# EAGLE board Qwiic_Hall_Effect_Sensor_TMAG5273_Mini (EAGLE 9.6.2)
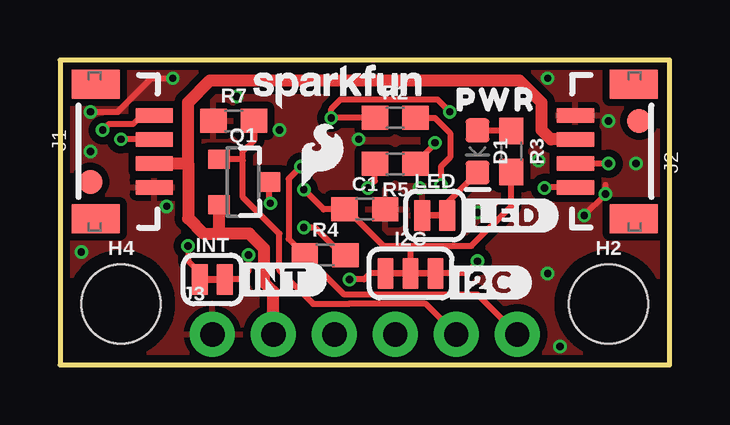
[diagram p0: board, top side]
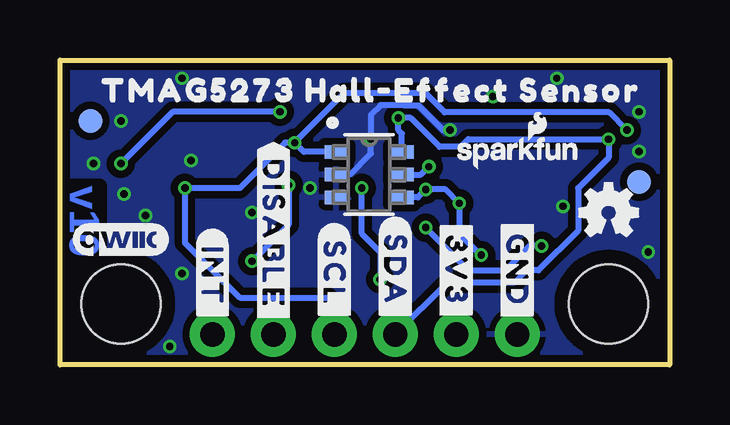
[diagram p1: board, bottom side, seen from below]

Size 25.4 x 12.7 mm. Coordinates in mm from the lower left corner, seen from the top.
Outline: 0,0 25.4,0 25.4,12.7 0,12.7 0,0
Copper layers (1*16): Top 0.035mm / dielectric 1.5mm / Bottom 0.035mm
Design rules "SparkFun-2-Layer-Minimum-JLCPCB": minimum track width 5mil, minimum drill 0.3mm, track to track 5mil, track to pad 5mil, pad to pad 5mil, via to via 5mil, smd to smd 5mil, copper to edge 7mil, drill to drill 7mil, minimum pad ring 5mil, minimum via ring 5mil, stop-mask expansion 2.5mil, vias tented up to drill 25mil, thermal gap 10mil

## Footprints (pad centres in the part's own frame; a part is rotated, then mirrored left to right if it is on the bottom)
0603 = smd 1.1 x 1: 1 -0.85,0; 2 0.85,0
LED-0603 = smd 1 x 1: A -0.877,0; C 0.877,0
FIDUCIAL-1X2 = smd 1 x 1: 1 0,0
STAND-OFF = hole 3.302: 0,0
SMT-JUMPER_3_2-NC_TRACE_SILK = smd 0.66 x 1.27: 1 -1.041,0; 2 0,0; 3 1.041,0
SMT-JUMPER_2_NC_TRACE_SILK = smd 0.66 x 1.27: 1 -0.521,0; 2 0.521,0
JST04_1MM_VERT = smd 0.6 x 1.55: 1 -1.5,0.775; 2 -0.5,0.775; 3 0.5,0.775; 4 1.5,0.775 | smd 1.2 x 2: NC1 -2.8,3.2; NC2 2.8,3.2
1X06_NO_SILK = drill 1.016 pad 1.88: 1 0,0; 2 2.54,0; 3 5.08,0; 4 7.62,0; 5 10.16,0; 6 12.7,0
SOT23-3 = smd 0.8 x 0.9: 1 -0.95,-1; 2 0.95,-1; 3 0,1.1
SOT23-6_DBV_TEX = smd 0.978 x 0.559: 1 -1.365,0.95; 2 -1.365,0; 3 -1.365,-0.95; 4 1.365,-0.95; 5 1.365,0; 6 1.365,0.95

## Placement (x,y rotation side)
C1  0.1uF  [0603]  12.7,6.48 0 top
D1  Red  [LED-0603]  17.4,8.89 270 top
FD1  FIDUCIAL1X2  [FIDUCIAL-1X2]  24.13,10.16 0 top
FD2  FIDUCIAL1X2  [FIDUCIAL-1X2]  1.27,7.62 0 top
FD3  FIDUCIAL1X2  [FIDUCIAL-1X2]  1.27,7.62 0 bottom
FD4  FIDUCIAL1X2  [FIDUCIAL-1X2]  24.13,10.16 0 bottom
FRAME1  FRAME-LETTER  [CREATIVE_COMMONS]  -11.43,-24.13 0 top  (outside the outline)
H2  STAND-OFF  [STAND-OFF]  22.86,2.54 0 top
H4  STAND-OFF  [STAND-OFF]  2.54,2.54 0 top
I2C  JUMPER-SMT_3_2-NC_TRACE_SILK  [SMT-JUMPER_3_2-NC_TRACE_SILK]  14.61,3.81 0 top
INT  JUMPER-SMT_2_NC_TRACE_SILK  [SMT-JUMPER_2_NC_TRACE_SILK]  6.35,3.56 0 top
J1  Vertical Qwiic Connector  [JST04_1MM_VERT]  4.7,8.89 90 top
J2  Vertical Qwiic Connector  [JST04_1MM_VERT]  20.7,8.89 270 top
J3  [1X06_NO_SILK]  6.35,1.27 0 top
LED  JUMPER-SMT_2_NC_TRACE_SILK  [SMT-JUMPER_2_NC_TRACE_SILK]  15.62,6.22 0 top
LOGO1  OSHW-LOGOMINI  [OSHW-LOGO-MINI]  2.54,6.35 0 bottom
LOGO2  SFE_LOGO_NAME_FLAME5_MM  [SFE_LOGO_NAME_FLAME_5MM]  6.35,8.89 0 bottom
LOGO3  QWIIC_LOGO_4MM  [QWIIC_4MM]  22.86,5.21 0 bottom
LOGO4  SFE_LOGO_NAME7_MM  [SFE_LOGO_NAME_7MM]  11.56,11.68 0 top
LOGO5  SPECIAL_INSTRUCTIONS-ORDERING  [ORDERING_INSTRUCTIONS]  44.45,50.8 0 top  (outside the outline)
LOGO6  SFE_LOGO_FLAME.1_INCH  [SFE_LOGO_FLAME_.1]  10.92,8.76 0 top
Q1  20V/4.2A/52mΩ/1.4W  [SOT23-3]  7.62,7.62 270 top
R2  2.2k  [0603]  13.97,10.29 0 top
R3  4.7k  [0603]  18.8,8.89 270 top
R4  10k  [0603]  11.05,4.57 0 top
R5  2.2k  [0603]  13.97,8.38 180 top
R7  10k  [0603]  7.24,10.16 0 top
U1  TMAG5273  [SOT23-6_DBV_TEX]  12.52,7.92 0 bottom
U$1  [PWR5282]  18.16,11.05 0 top
U$2  [#SCL#38]  13.97,3.81 270 bottom
U$3  [#SDA#37]  11.43,3.94 270 bottom
U$4  [#3V3#37]  8.89,3.94 270 bottom
U$5  [#GND#36]  6.35,3.94 270 bottom
U$6  [TMAG5273_HALL#EFFECT_SENSOR0]  12.45,11.43 0 bottom
U$7  [#DISABLE#5291]  16.51,5.46 270 bottom
U$8  [#I2C#5276]  17.78,3.43 0 top
U$9  [#INT#5285]  19.05,3.68 270 bottom
U$10  [#LED#5275]  18.67,6.22 0 top
U$12  [#INT#5287]  9.14,3.56 0 top

## Library data of the parts
C1 = SparkFun-Capacitors; PROD_ID: CAP-16503
D1 = SparkFun-LED; PROD_ID: DIO-17976
FD1-FD4 LOGO1-LOGO6 = SparkFun-Aesthetics
FRAME1 = SparkFun-Aesthetics; DESIGNER: M. Chodikov; REV: v10
H2 H4 = SparkFun-Hardware
I2C INT LED = SparkFun-Jumpers
J1 J2 = SparkFun-Connectors; PROD_ID: CONN-14483
J3 = SparkFun-Connectors; PROD_ID: CONN-08437
Q1 = SparkFun-DiscreteSemi; PROD_ID: TRANS-14388
R2 R5 = SparkFun-Resistors; PROD_ID: RES-08272
R3 = SparkFun-Resistors; PROD_ID: RES-07857
R4 R7 = SparkFun-Resistors; PROD_ID: RES-00824
U1 = TMAG5273; PROD_ID: ROB-18440
U$1-U$10 U$12 = output

## Nets
3.3V: J1.2 J2.2 J3.2 Q1.2
3.3V_SW: C1.1 I2C.2 INT.2 Q1.3 R3.2 U1.4
!INT: J3.6 R4.1 U1.5
DISABLE: J3.5 Q1.1 R7.2
GND: C1.2 J1.1 J2.1 J3.1 LED.1 R7.1 U1.2 U1.3
N$1: D1.C LED.2
N$2: I2C.3 R2.2
N$4: D1.A R3.1
N$5: INT.1 R4.2
N$6: I2C.1 R5.2
SCL: J1.4 J2.4 J3.4 R5.1 U1.1
SDA: J1.3 J2.3 J3.3 R2.1 U1.6

## Tracks (layer width: path | path; a pad name or v marks a point on that pad's centre or on a via)
3.3V
  Top 0.508: 5.33,8.39 5.33,10.92 6.25,11.84 19.15,11.84 20.07,10.92 20.07,9.78 20.45,9.39 J2.2 | J1.2 5.33,8.39 | 6.6,5.46 5.97,5.46 5.33,6.1 5.33,8.39 | Q1.2 6.62,5.48 6.6,5.46 | J3.2 8.89,3.05 8.51,3.43 8.51,4.85 7.89,5.46 6.6,5.46
3.3V_SW  (via drill 0.3)
  Top 0.254: R3.2 18.8,6.6 17.14,4.95 14.61,4.95 | 14.61,4.95 13.46,4.95 11.94,6.48 C1.1 10.99,6.48 v10.16,7.3 | I2C.2 14.61,4.95 | v8.76,6.73 8.72,6.77 Q1.3 | v7.85,4.57 7.85,3.91 7.49,3.56 INT.2
  Bottom 0.254: U1.4 10.49,6.97 v10.16,7.3 9.34,7.3 v8.76,6.73 8.76,5.46 7.87,4.57 v7.85,4.57
!INT  (via drill 0.3)
  Top 0.254: v10.03,8.26 9.53,7.75 9.53,5.25 R4.1 11.85,2.92 17.4,2.92 J3.6
  Bottom 0.254: U1.5 10.36,7.92 v10.03,8.26
DISABLE
  Top 0.254: 7.62,8.51 7.62,6.99 9.14,5.46 9.14,3.94 10.54,2.54 12.04,2.54 15.24,2.54 J3.5 | 7.62,8.51 7.62,8.89 8.09,9.36 R7.2 | 7.62,8.51 7.56,8.57 Q1.1
GND  (via drill 0.3)
  Top 0.254: v1.27,10.54 2.41,10.54 3.81,11.94 v4.7,11.94 | v21.84,6.22 v22.73,7.11 22.73,7.49
  Bottom 0.254: v9.14,9.78 9.17,9.75 9.4,9.75 10.45,10.79 11.06,10.79 11.08,10.82 12.04,10.82 12.45,10.41 v12.45,9.4 12.45,8.81 13.33,7.92 U1.2
  other vias: 14.99,7.37 22.86,10.16 4.45,6.6 7.37,11.18 20.32,3.81 19.94,8.51 24,8.38 17.4,6.35 1.27,8.89 20.32,11.94 20.83,0.76 0.89,4.7
  pour Top (isolate 0.305): 0,0 0,12.7 25.4,12.7 25.4,0
  pour Bottom (isolate 0.305): 0,0 0,12.7 25.4,12.7 25.4,0
N$1
  Top 0.254: LED.2 16.14,6.76 D1.C
N$2  (via drill 0.3)
  Top 0.254: R2.2 15.62,10.29 16.26,9.65 16.26,8.64 15.87,8.26 v15.87,7.5 | v17.4,4.32 16.89,3.81 I2C.3
  Bottom 0.254: v15.87,7.5 15.87,5.84 v17.4,4.32
N$4
  Top 0.254: D1.A 18.77,9.77 R3.1
N$5  (via drill 0.3)
  Top 0.254: INT.1 5.83,3.82 5.33,4.32 v5.33,4.95 | R4.2 11.77,4.57 10.63,5.71 v10.16,5.71
  Bottom 0.254: v5.33,4.95 5.84,4.95 6.86,3.94 8.38,3.94 v10.16,5.71
N$6  (via drill 0.3)
  Top 0.254: I2C.1 12.93,3.81 12.68,3.56 v12.06,3.56 | R5.2 13.12,7.66 v12.83,7.37
  Bottom 0.254: v12.83,7.37 12.83,5.46 12.06,4.7 v12.06,3.56
SCL  (via drill 0.3)
  Top 0.254: J1.4 3.4,10.39 3.05,10.03 2.03,10.03 v1.78,9.78 | v15.62,9.25 15.62,9.18 R5.1 | J2.4 20.22,7.39 v20.19,7.37
  Bottom 0.254: v1.78,9.78 2.52,10.52 9.37,10.52 10.19,11.33 13.56,11.33 15.62,9.27 v15.62,9.25 | v15.62,9.25 16.02,9.25 17.91,7.37 v20.19,7.37 20.19,5.08 17.91,2.79 14.22,2.79 13.97,2.54 J3.4 | U1.1 15.24,8.88 v15.62,9.25
SDA  (via drill 0.3)
  Top 0.254: J1.3 v2.55,9.39 v2.54,9.4 | R2.1 v11.3,10.29 11.3,10.67 11.68,11.05 15.73,11.05 v16.24,10.54 | J2.3 v22.85,8.39 v22.86,8.38
  Bottom 0.254: v22.86,8.38 20.7,10.54 v16.24,10.54 | J3.3 9.27,3.43 6.48,3.43 5.97,3.94 5.47,3.94 3.81,5.6 3.81,7.37 2.54,8.64 v2.54,9.4 8.38,9.4 8.7,9.08 9.59,9.08 10.79,10.29 v11.3,10.29 11.3,9.78 11.16,9.63 U1.6

## Text on the board
Bottom: v10
tDocu: Solder Mask: Red / Thickness: 1.6mm / Two layer design / Finish: HASL Lead-Free / Copper Weight: 1oz / Material: TG135-140 | M. Chodikov